# EAGLE board PCB v27 (EAGLE 9.7.0)
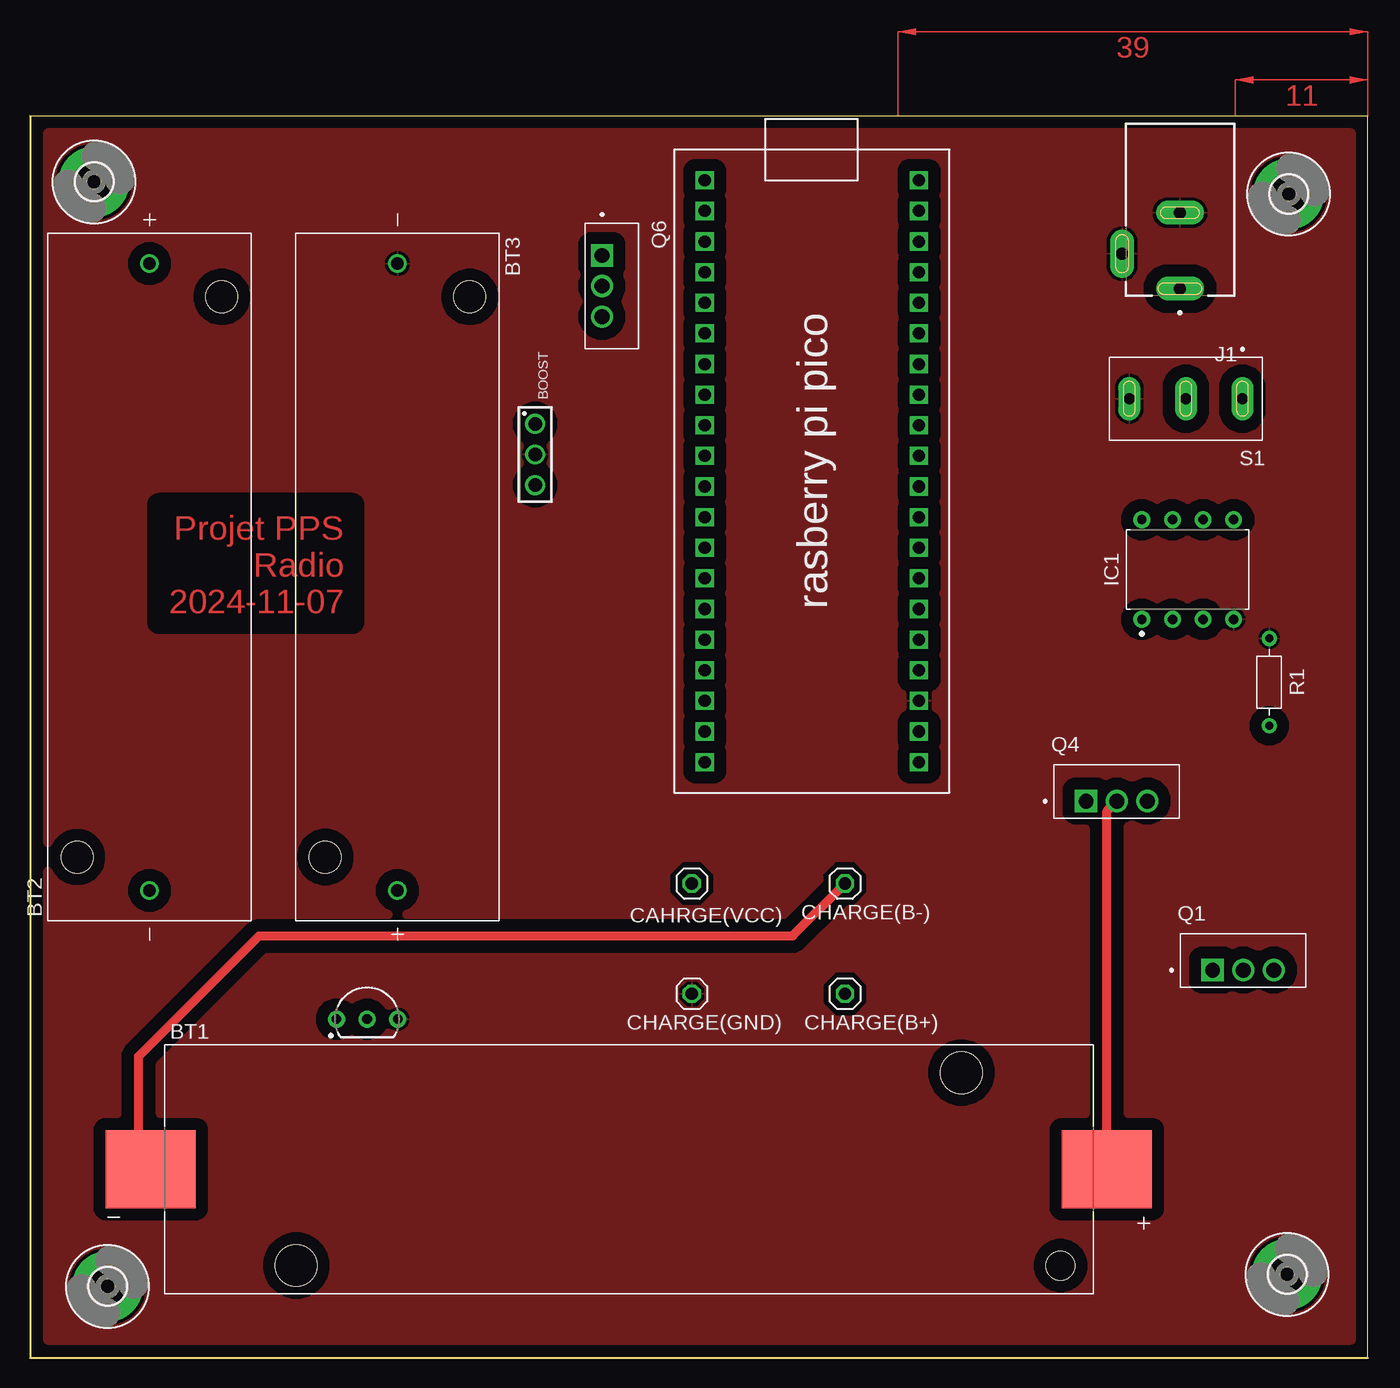
[diagram p0: board, top side]
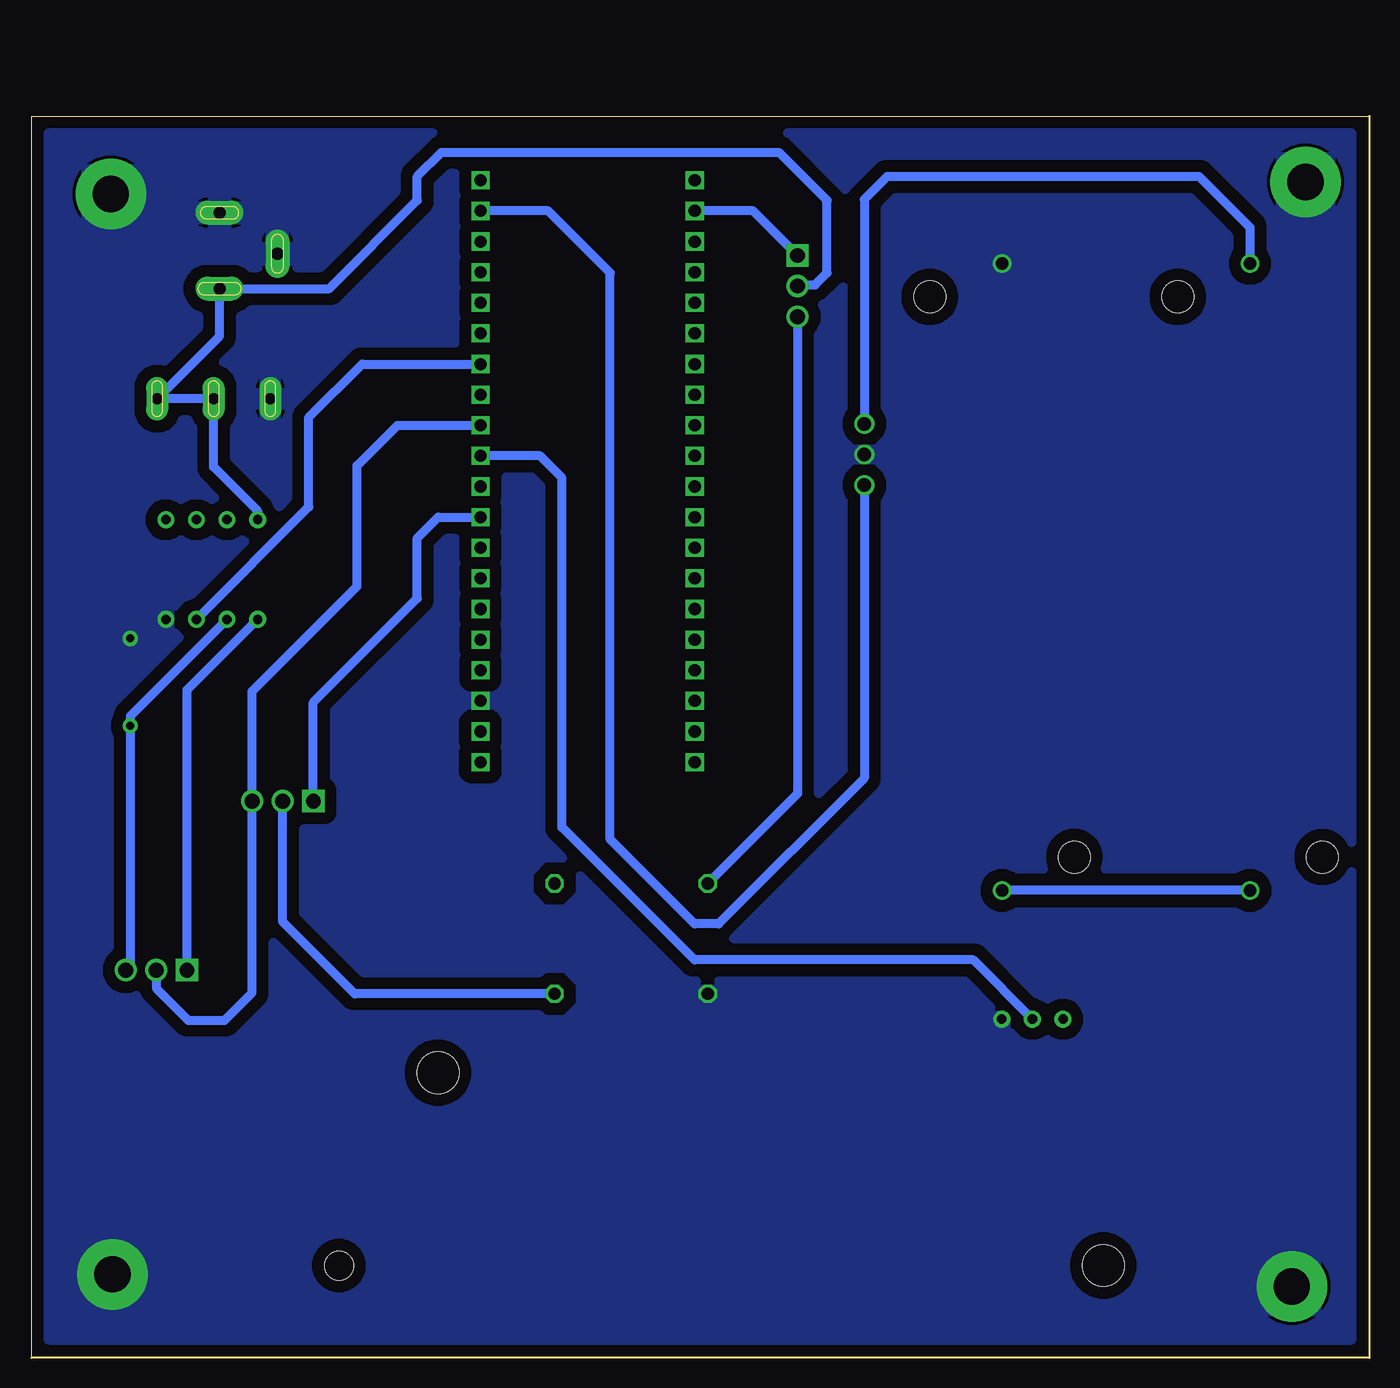
[diagram p1: board, bottom side, seen from below]

Size 111 x 103 mm. Coordinates in mm from the lower left corner, seen from the top.
Outline: 111,0 111,103 0,103 0,0 111,0
Copper layers (1*16): Top / Bottom
Stack-up Default Layer Stack: Top User Defined 0.035mm / Dielectric-1 User Defined 1.5mm / Bottom User Defined 0.035mm
Design rules: minimum copper width 6mil, minimum drill size 0.35mm, copper clearance wire_polygon to wire_polygon 6mil, copper clearance wire_polygon to pad_smd 6mil, copper clearance wire_polygon to via 6mil, copper clearance pad_smd to pad_smd 6mil, copper clearance pad_smd to via 6mil, copper clearance via to via 6mil, copper clearance smd to pad (same net) 6mil, copper clearance smd to via (same net) 6mil, copper clearance smd to smd (same net) 6mil, dimension clearance 40mil, via restrict clearance 0mil, restrict clearance 0mil, drill distance 6mil, keepout clearance 0mil

## Footprints (pad centres in the part's own frame; a part is rotated, then mirrored left to right if it is on the bottom)
61300311121 = drill 1.1: 1 -2.54,0; 2 0,0; 3 2.54,0
BAT_1042 = smd 7.46 x 6.47: N -39.67,0; P 39.67,0 | hole 3.45: 27.6,8; -27.6,-8 | hole 2.39: 35.82,-8
BAT_2460 = drill 1.02: N -25.995,0; P 25.995,0 | hole 2.64: -23.24,5.995; 23.24,-5.995
1X01 = drill 1.016 octagon: 1 0,0
3,0-PAD = drill 3 pad 5.842: B3,0 0,0
DIP826W53P254L959H508Q8B = drill 0.786 pad 1.386: 1 -4.13,3.81; 2 -4.13,1.27; 3 -4.13,-1.27; 4 -4.13,-3.81; 5 4.13,-3.81; 6 4.13,-1.27; 7 4.13,1.27; 8 4.13,3.81
GCT_DCJ250-10-A-XX-X_REVA = drill 1 pad 2 long: 1 0,6.55; 2 0,0.25; 3 4.8,3.65
TO254P1054X469X1930-3 = drill 1.23 square: 1 -2.54,-0.81 | drill 1.23: 2 0,-0.81; 3 2.54,-0.81
RESAD724W46L381D178B = drill 0.66 pad 1.26: 1 -3.62,0; 2 3.62,0
SW_100SP1T1B1M1QEH = drill 0.91 pad 1.81 long: 1 -4.7,0; 2 0,0; 3 4.7,0
RASPBERRY_PI_PICO = drill 1 square: 3V3 8.89,12.7; 3V3_EN 8.89,15.24; ADC_VREF 8.89,10.16; AGND 8.89,5.08; GND 8.89,17.78; GND2 8.89,-7.62; GND3 8.89,-20.32; GND4 -8.89,17.78; GND5 -8.89,5.08; GND6 -8.89,-7.62; GND7 -8.89,-20.32; GP0 -8.89,22.86; GP1 -8.89,20.32; GP2 -8.89,15.24; GP3 -8.89,12.7; GP4 -8.89,10.16; GP5 -8.89,7.62; GP6 -8.89,2.54; GP7 -8.89,0; GP8 -8.89,-2.54; GP9 -8.89,-5.08; GP10 -8.89,-10.16; GP11 -8.89,-12.7; GP12 -8.89,-15.24; GP13 -8.89,-17.78; GP14 -8.89,-22.86; GP15 -8.89,-25.4; GP16 8.89,-25.4; GP17 8.89,-22.86; GP18 8.89,-17.78; GP19 8.89,-15.24; GP20 8.89,-12.7; GP21 8.89,-10.16; GP22 8.89,-5.08; GP26_A0 8.89,0; GP27_A1 8.89,2.54; GP28_A2 8.89,7.62; RUN 8.89,-2.54; VBUS 8.89,22.86; VSYS 8.89,20.32
LP0003A = drill 0.8 pad 1.4: 1 0,-2.54; 2 0,0; 3 0,2.54

## Placement (x,y rotation side)
BOOST  Boost  [61300311121]  41.91,74.93 270 top
BT1  1042  [BAT_1042]  49.68,15.65 0 top
BT2  2460  [BAT_2460]  9.91,64.77 90 top
BT3  2460  [BAT_2460]  30.48,64.77 270 top
CAHRGE(VCC)  PINHD-1X1  [1X01]  54.91,39.34 0 top
CHARGE(B+)  PINHD-1X1  [1X01]  67.61,30.19 0 top
CHARGE(B-)  PINHD-1X1  [1X01]  67.61,39.34 0 top
CHARGE(GND)  PINHD-1X1  [1X01]  54.91,30.19 0 top
H1  MOUNT-PAD-ROUND3.0  [3,0-PAD]  104.3,6.92 0 top
H2  MOUNT-PAD-ROUND3.0  [3,0-PAD]  6.43,5.92 0 top
H3  MOUNT-PAD-ROUND3.0  [3,0-PAD]  5.3,97.54 0 top
H4  MOUNT-PAD-ROUND3.0  [3,0-PAD]  104.43,96.54 0 top
IC1  LM358_DIP  [DIP826W53P254L959H508Q8B]  96.06,65.39 90 top
J1  DCJ250-10-A-XX-X_REVA  [GCT_DCJ250-10-A-XX-X_REVA]  95.41,95.23 180 top
Q1  IRFZ44N  [TO254P1054X469X1930-3]  100.66,32.97 0 top
Q4  IRFZ44N  [TO254P1054X469X1930-3]  90.17,46.99 0 top
Q6  IRFZ44N  [TO254P1054X469X1930-3]  48.26,88.9 270 top
R1  1ohm/2W  [RESAD724W46L381D178B]  102.82,56.05 270 top
S1  100SP1T1B1M1QEH  [SW_100SP1T1B1M1QEH]  95.9,79.56 180 top
U1  RASPBERRY_PI_PICO  [RASPBERRY_PI_PICO]  64.87,74.81 0 top
U2  LM335Z/NOPBLP0003A  [LP0003A]  27.96,28.09 270 top

## Library data of the parts
BOOST = 6130XX11121_61300311121; DATASHEET-URL: https://www.we-online.com/redexpert/spec/61300311121?ae; GENDER: Pin Header; IR: 3A; MOUNT: THT; PACKAGING: Bag; PART-NUMBER: 61300311121; PINS: 3; PITCH: 2.54mm; ROWS: Single; TYPE: Straight
BT1 = 1042; MANUFACTURER: Keystone; MAXIMUM_PACKAGE_HEIGHT: 15.11mm; PARTREV: E; SNAPEDA_PN: 1042; STANDARD: Manufacturer Recommendations
BT2 BT3 = 2460; MANUFACTURER: Keystone; MAXIMUM_PACKAGE_HEIGHT: 14.14mm; PARTREV: B; SNAPEDA_PN: 2460; STANDARD: Manufacturer Recommendations
CAHRGE(VCC) CHARGE(B+) CHARGE(B-) CHARGE(GND) = Connector; CATEGORY: Headers; DESCRIPTION: Header, Straight, 1 Position; MANUFACTURER: Generic; MPN: Generic; OPERATING_TEMPERATURE: Generic; PART_STATUS: Active; PITCH: 0.100" (2.54mm); ROHS_COMPLIANCE: Generic; SERIES: Generic; SUB-CATEGORY: Headers, Male Pins; TYPE: Board to Board or Cable, Unshrouded, Through Hole, Straight
H1-H4 = holes
IC1 = IC_Linear; CATEGORY: Amplifier; DESCRIPTION: Dual Operational Amplifier; MANUFACTURER: Generic; MPN: Generic; SERIES: LM358; SUB-CATEGORY: OpAmp; TYPE: Dual
J1 = DCJ250-10-A-XX-X_REVA; MANUFACTURER: Global Connector Technology; MAXIMUM_PACKAGE_HEIGHT: 11 mm; PARTREV: A; SNAPEDA_PN: DCJ250-10-A-K1-K; STANDARD: Manufacturer Recommendations
Q1 Q4 Q6 = IRF540NPBF; MANUFACTURER: Infineon; MAXIMUM_PACKAGE_HEIGHT: 19.3 mm; PARTREV: 11/3/03; SNAPEDA_PN: IRF540NPBF; STANDARD: IPC 7351B
R1 = Resistor; CATEGORY: Resistor; SUB-CATEGORY: Fixed
S1 = 100SP1T1B1M1QEH; MANUFACTURER: E-switch; MAXIMUM_PACKAGE_HEIGHT: 30.21 mm; PARTREV: D; STANDARD: IPC 7351B
U1 = RASPBERRY_PI_PICO; AVAILABILITY: In Stock; CHECK_PRICES: https://www.snapeda.com/parts/RASPBERRY%20PI%20PICO/Raspberry+Pi/view-part/?ref=eda; DESCRIPTION: Raspberry Pi Board, Arm Cortex-M0+; Core Architecture:Arm; Core Sub-Architecture:Cortex-M0+; Kit Contents:Raspberry Pi Pico Board; No. Of Bits:32Bit; Silicon Core Number:Rp2040; Silicon Manufacturer:Raspberry Pi |Raspberry-Pi RASPBERRY PI PICO; MF: Raspberry Pi; MP: RASPBERRY PI PICO; PACKAGE: None; PRICE: None; SNAPEDA_LINK: https://www.snapeda.com/parts/RASPBERRY%20PI%20PICO/Raspberry+Pi/view-part/?ref=snap
U2 = LM335; COPYRIGHT: Copyright (C) 2024 Ultra Librarian. All rights reserved.; MANUFACTURER_PART_NUMBER: LM335Z/NOPB; MFR_NAME: Texas Instruments

## Nets
3V: BOOST.3 U1.VSYS
5V: IC1.8 J1.1 Q6.2 S1.1 S1.2
GND: BOOST.2 BT3.N CHARGE(GND).1 H1.B3,0 H2.B3,0 H3.B3,0 H4.B3,0 IC1.4 J1.2 J1.3 R1.1 S1.3 U1.GND3 U2.3
GP1: Q6.1 U1.GP1
GP22: Q4.1 U1.GP22
GP26: U1.GP26_A0 U2.2
GP27: Q1.2 Q4.3 U1.GP27_A1
GP28: IC1.3 U1.GP28_A2
N$3: CAHRGE(VCC).1 Q6.3
N$4: BT1.N CHARGE(B-).1
N$5: BT1.P CHARGE(B+).1 Q4.2
N$6: IC1.1 Q1.1
N$7: IC1.2 Q1.3 R1.2
N$8: BT2.N BT3.P
N$9: BOOST.1 BT2.P

## Tracks (layer width: path | path; a pad name or v marks a point on that pad's centre or on a via)
3V
  Bottom 0.762: BOOST.3 41.91,48.09 54,36 56,36 63,43 63,90 68.13,95.13 U1.VSYS
5V
  Bottom 0.762: IC1.8 92.25,70.25 95.9,73.9 S1.2 S1.1 95.41,84.75 J1.1 86.32,88.68 79,96 79,98 77,100 49,100 45,96 45,90 46,89 47.35,89 Q6.2
GND
  pour Top (isolate 1): 0,103 0,0 111,0 111,103
  pour Bottom (isolate 1): 0,103 111,103 111,0 0,0
GP1
  Bottom 0.762: Q6.1 51.14,95.13 U1.GP1
GP22
  Bottom 0.762: Q4.1 87.63,54.37 79,63 79,68 77.27,69.73 U1.GP22
GP26
  Bottom 0.762: U2.2 32.87,33 56,33 67,44 67,73 68.81,74.81 U1.GP26_A0
GP27
  Bottom 0.762: Q1.2 100.66,30.66 98,28 95,28 92.71,30.29 Q4.3 92.71,55.29 84,64 84,74 80.65,77.35 U1.GP27_A1
GP28
  Bottom 0.762: IC1.3 88,70.59 88,78 83.57,82.43 U1.GP28_A2
N$3
  Bottom 0.762: Q6.3 47.45,46.8 CAHRGE(VCC).1
N$4
  Top 0.762: BT1.N 9,16.66 9,25 19,35 63.27,35 CHARGE(B-).1
N$5
  Top 0.762: BT1.P 89.35,45.36 Q4.2
  Bottom 0.762: CHARGE(B+).1 84.19,30.19 90.17,36.17 Q4.2
N$6
  Bottom 0.762: Q1.1 98.12,55.39 IC1.1
N$7
  Bottom 0.762: 94.79,61.21 IC1.2 102.82,53.23 R1.2 102.82,32.54 Q1.3
N$8
  Bottom 0.762: BT2.N BT3.P
N$9
  Bottom 0.762: BT2.P 9.91,93.77 14.14,98 40,98 41.91,96.09 BOOST.1
(copper drawn outside any net)
  shapes: Top area x2

## Text on the board
Top: Projet PPS / Radio / 2024-11-07